# Altium PCB CoreV1.1_test.PcbDoc (part 9 of 14)
Units mil, origin at the board's own origin, x right, y up, seen from the top; angles counter-clockwise.
Board outline 2860 x 2420 mil, 6 copper layers (Top Layer, GND, SIGNAL_1, SIGNAL_2, POWER, Bottom Layer); 110 components, 241 nets, 882 pads, 697 vias.
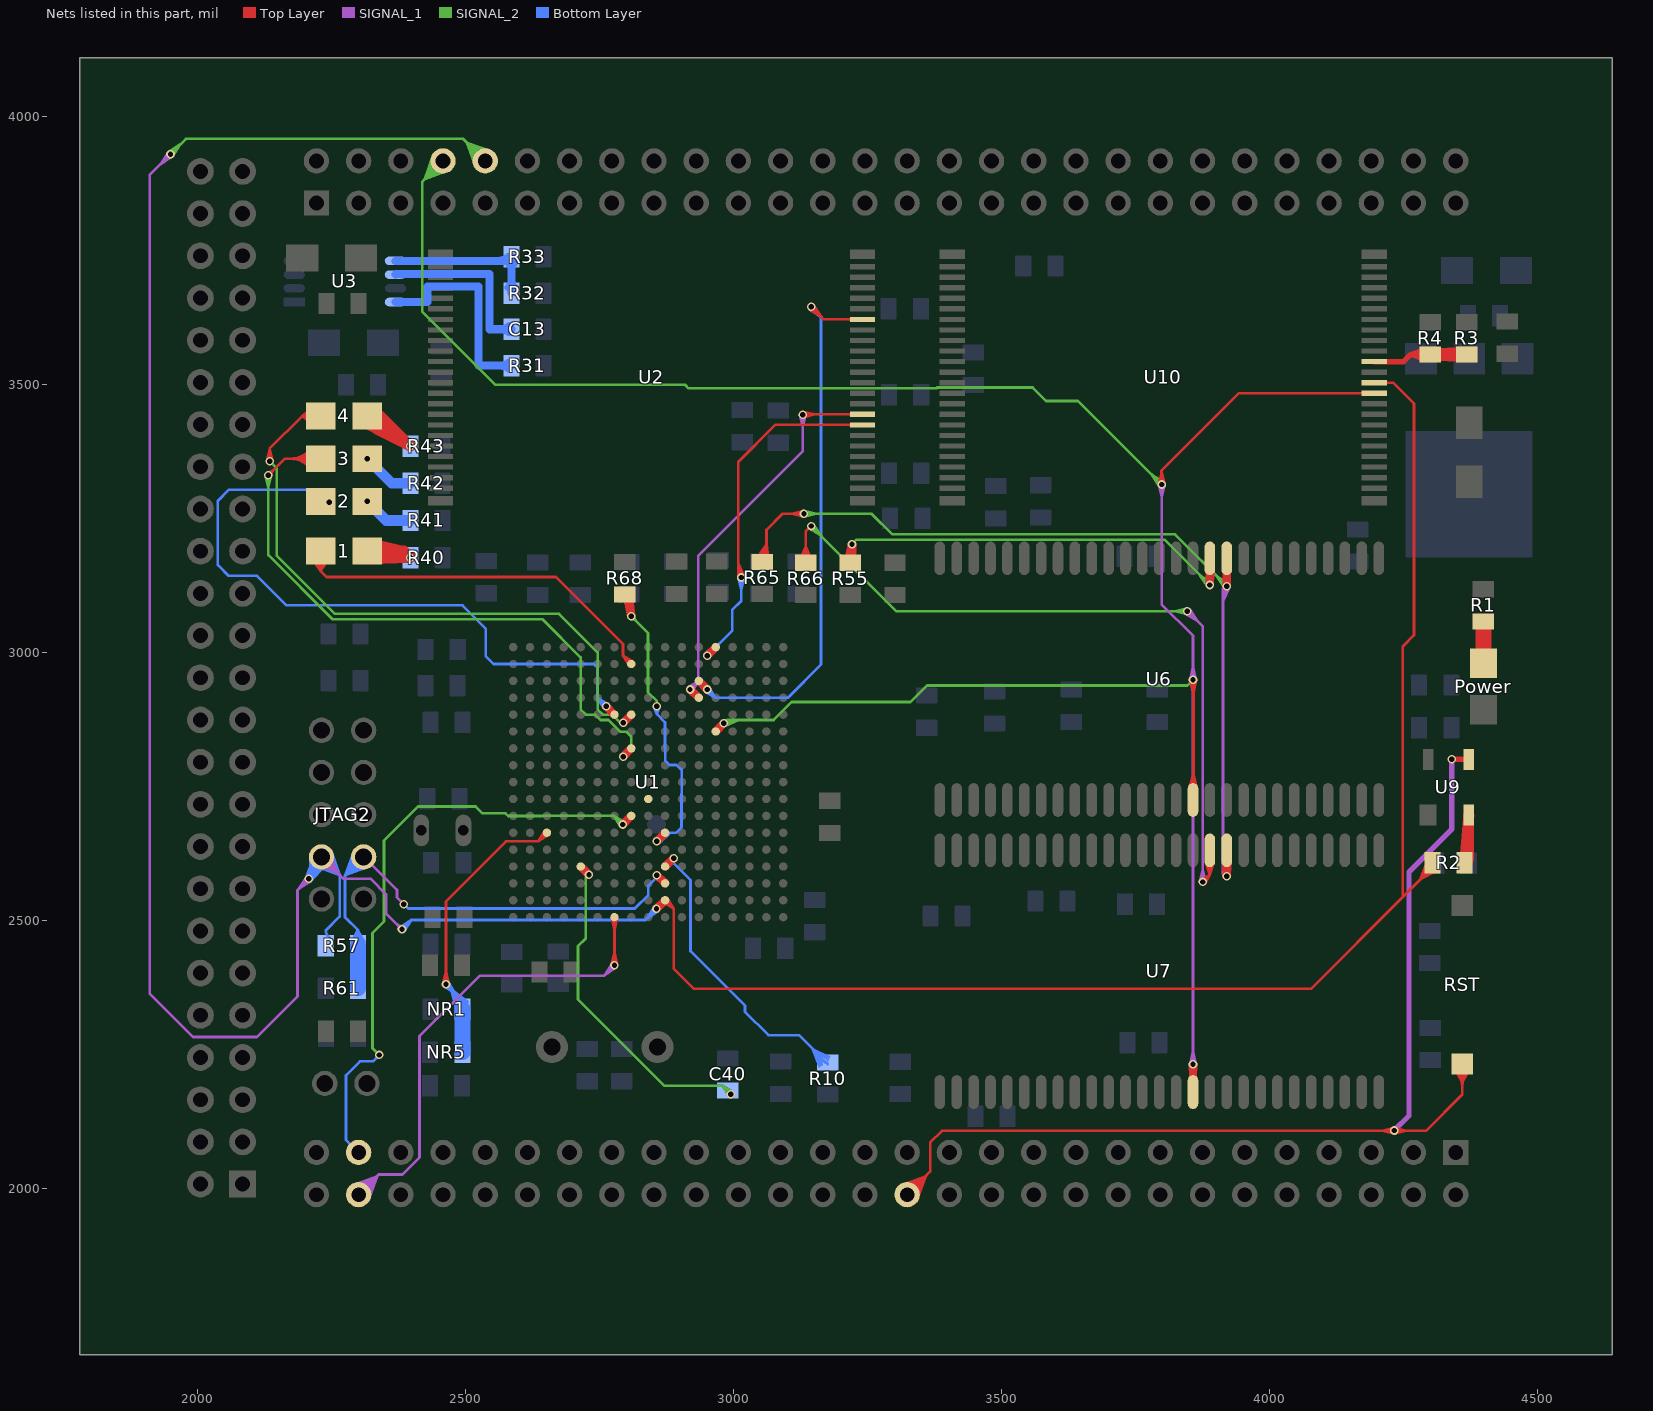
[diagram p13: the nets of this part, all layers, seen from the top]

## Via types
v1: diameter 16, hole 10, Top Layer to Bottom Layer, tented both sides, 637 vias
v2: diameter 30, hole 18, Top Layer to Bottom Layer, tented both sides, 56 vias
v3: diameter 16, hole 10, Top Layer to Bottom Layer, 2 vias
v4: diameter 30, hole 16, Top Layer to Bottom Layer, tented both sides, 1 vias
v5: diameter 16/16/16/16 (per signal layer), hole 10, Top Layer to Bottom Layer, tented both sides, 1 vias

## Nets (pads, with @x,y where several pads share a name; then routed paths per layer and width w, separated by ;. In a path a pad name is that pad's centre, name@x,y a point inside that pad or via, vN(x,y) a via of type N, cw(c..) or ccw(c..) an arc to the next point about the centre after c; other vN are vias at no path point) (continued)
LNWE: pad.PC8 U1.E6 U6.16 U7.16 U10.11 | length 6656.2
  Top Layer w5: U1.E6@2966.87,2858 ccw(c2966.87,2870.97) 2976.04,2861.8 ccw(c2985.22,2852.62) U1.E6@2972.24,2852.62 ; v1@2976.5,2867.75 cw(c2963.22,2867.75) 2972.61,2858.36 cw(c2982,2848.97) v1@2982,2862.25 ; v1@2976.94,2869.92 U1.E6@2971.12,2849.33 ; v1@2977.64,2871.11 U1.E6@2966.87,2852.62 ; v1@2978.62,2872.09 U1.E6@2963.58,2856.87 ; v1@2984.17,2862.7 U1.E6@2963.58,2856.87 ; v1@2985.36,2863.4 U1.E6@2966.87,2852.62 ; v1@2986.34,2864.37 U1.E6@2971.12,2849.33 ; v1@3793.46,3314.16 3798.92,3336.5 v1@3804.38,3314.16 ; v1@3795.03,3317.39 ccw(c3785.64,3326.78) 3798.92,3326.78 ccw(c3812.2,3326.78) v1@3802.81,3317.39 ; v1(3798.92,3313.5) 3798.92,3339.42 3943.5,3484 4195.66,3484 U10.11@4195.83,3483.84 ; U7.16@3850.31,2202.47 v1@3857.57,2226.23 ; U6.16@3850.35,2747.71 3858.39,2771.24 ; v1@3852.1,2232.06 U7.16@3852.18,2208.59 ; v1@3852.13,2948.15 3858.39,2925.96 ; U7.16@3852.38,2206.58 ccw(c3839.84,2219.11) 3857.57,2219.11 ccw(c3875.29,2219.11) U7.16@3862.76,2206.58 ; v1@3852.4,2229.55 U7.16@3862.96,2208.59 ; U6.16@3852.38,2751.58 ccw(c3837.85,2766.1) 3858.39,2766.1 ; v1@3853.68,2227.54 cw(c3844.29,2218.15) 3857.57,2218.15 cw(c3870.85,2218.15) v1@3861.46,2227.54 ; v1@3853.68,2945.11 cw(c3842.3,2933.73) 3858.39,2933.73 ; U7.16@3857.57,2179.73 v1(3857.57,2231.43) ; U7.16@3857.57,2201.39 v1@3857.57,2226.23 ; U6.16@3857.57,2724.73 3858.39,2725.56 3858.39,2948.17 v1(3857.57,2949) 3858.39,2925.96 ; U6.16@3857.57,2746.39 3858.39,2771.24 ; 3858.39,2762.12 ccw(c3873.3,2762.12) U6.16@3862.76,2751.58 ; 3858.39,2937.71 cw(c3868.85,2937.71) v1@3861.46,2945.11 ; v1@3862.74,2229.55 U7.16@3852.18,2208.59 ; v1@3863.03,2232.06 U7.16@3862.96,2208.59 ; v1@3863.05,2948.54 3858.39,2925.96 ; U7.16@3864.83,2202.47 v1@3857.57,2226.23 ; U6.16@3864.86,2747.23 3858.39,2771.24 ; 4157.2,3484 U10.11@4177.13,3483.84 ; 4170.89,3484 cw(c4170.89,3477.6) U10.11@4175.41,3482.13 ; 4171.67,3484 ccw(c4171.67,3489.29) U10.11@4175.41,3485.55 ; U1.E6@2963.58,2856.87 v1(2982,2867.75) ; U1.E6@2963.58,2856.87 v1(2982,2867.75) ; U1.E6@2966.87,2852.62 v1(2982,2867.75) ; U1.E6@2966.87,2852.62 v1(2982,2867.75) ; U1.E6@2971.12,2849.33 v1(2982,2867.75) ; U1.E6@2971.12,2849.33 v1(2982,2867.75) ; U7.16@3852.18,2208.59 v1(3857.57,2231.43) ; U7.16@3857.57,2208.43 3863.03,2230.77 U7.16@3857.57,2208.43 ; U7.16@3857.57,2208.43 3852.11,2230.77 U7.16@3857.57,2208.43 ; U7.16@3857.57,2208.43 v1(3857.57,2231.43) ; v1(3857.57,2231.43) U7.16@3862.96,2208.59
  SIGNAL_1 w5: v1@3793.46,3312.82 3799,3290.5 ; v1@3795.03,3309.61 cw(c3785.45,3300.03) 3799,3300.03 ; v1(3798.92,3313.5) 3799,3290.5 ; 3799,3300.41 cw(c3812.01,3300.41) v1@3802.81,3309.61 ; v1@3799,3313.5 3799,3090 3857.57,3031.43 v1(3857.57,2949) ; v1@3804.38,3312.86 3799,3290.5 ; v1@3852.11,2232.09 3857.57,2254.43 v1@3863.03,2232.09 ; v1@3852.11,2948.34 3857.57,2926 ; v1@3852.11,2949.66 3857.57,2972 v1@3863.03,2949.66 ; v1@3853.68,2235.32 ccw(c3844.29,2244.71) 3857.57,2244.71 ccw(c3870.85,2244.71) v1@3861.46,2235.32 ; v1@3853.68,2945.11 cw(c3844.29,2935.72) 3857.57,2935.72 cw(c3870.85,2935.72) v1@3861.46,2945.11 ; v1@3853.68,2952.89 ccw(c3844.29,2962.28) 3857.57,2962.28 ccw(c3870.85,2962.28) v1@3861.46,2952.89 ; v1(3857.57,2231.43) v1(3857.57,2949) ; v1@3863.03,2948.34 3857.57,2926 ; 3857.57,2926 v1(3857.57,2949)
  SIGNAL_2 w5: pad.PC8@2436.89,3917.45 cw(c2385.9,3917.45) 2421.96,3881.39 cw(c2458.02,3845.33) pad.PC8@2458.02,3896.33 ; pad.PC8@2440.18,3928.77 2423.79,3883.22 ; pad.PC8@2441.89,3917.45 cw(c2402.97,3917.45) 2430.49,3889.93 cw(c2458.02,3862.4) pad.PC8@2458.02,3901.33 ; pad.PC8@2444.88,3926.79 2423.79,3883.22 ; pad.PC8@2446.89,3917.45 cw(c2420.04,3917.45) 2439.03,3898.46 cw(c2458.02,3879.48) pad.PC8@2458.02,3906.33 ; pad.PC8@2449.3,3924.36 2423.79,3883.22 ; pad.PC8@2453.42,3921.49 2423.79,3883.22 ; pad.PC8@2458.02,3917.45 2419,3878.43 2419,3636.5 2556,3499.5 2910,3499.5 2916.5,3493 3379,3493 3380.5,3494.5 3558.42,3494.5 3583.42,3469.5 3642.92,3469.5 v1(3798.92,3313.5) 3780.31,3332.11 ; pad.PC8@2462.06,3912.85 2423.79,3883.22 ; pad.PC8@2464.93,3908.73 2423.79,3883.22 ; pad.PC8@2467.36,3904.31 2423.79,3883.22 ; pad.PC8@2469.33,3899.61 2423.79,3883.22 ; v1@2981.3,2873.21 3009.21,2873.99 ; v1(2982,2867.75) 3009.21,2873.99 ; v1@2982.35,2867.4 cw(c2998.27,2851.48) 2998.27,2873.99 ; v1@2983.75,2862.54 3009.21,2873.99 ; v1@2985.89,2863.86 cw(c3010.34,2839.41) 3010.34,2873.99 ; 2988.24,2873.99 3075.13,2873.99 3108.64,2907.5 3330.22,2907.5 3361.22,2938.5 3847.07,2938.5 v1(3857.57,2949) ; v1@3793.42,3313.5 ccw(c3780.14,3313.5) 3789.53,3322.89 ccw(c3798.92,3332.28) v1@3798.92,3319 ; v1@3794.65,3310.04 3780.31,3332.11 ; v1@3802.38,3317.77 3780.31,3332.11
LSCKE: R65.1 U6.37 U7.37 | length 3189.9
  Top Layer w5: R65.1@3042.07,3174.38 3061.5,3201.4 ; R65.1@3046.39,3171.75 3061.5,3201.4 ; R65.1@3049.57,3177.95 ccw(c3020.77,3206.76) 3061.5,3206.76 ; R65.1@3053.11,3174.42 ccw(c3032.84,3194.68) 3061.5,3194.68 ; R65.1@3060.84,3168.12 3061.5,3201.4 ; 3061.5,3191.83 ccw(c3081.13,3191.83) R65.1@3067.25,3177.95 ; R65.1@3065.89,3168.41 3061.5,3201.4 ; v1@3127.61,3255.11 ccw(c3118.22,3245.72) 3118.22,3259 ccw(c3118.22,3272.28) v1@3127.61,3262.89 ; v1@3130.84,3253.54 3108.5,3259 ; v1@3130.84,3264.46 3108.5,3259 ; U7.37@3913.3,2608.18 v1@3920.56,2584.42 ; U6.37@3913.3,3153.18 v1@3920.56,3129.42 ; v1@3915.12,2581.6 U7.37@3914.3,2604.91 ; v1@3915.09,3123.39 U6.37@3915.22,3146.88 ; U7.37@3915.37,2604.07 cw(c3902.83,2591.53) 3920.56,2591.53 cw(c3938.29,2591.53) U7.37@3925.75,2604.07 ; U6.37@3915.37,3149.07 cw(c3902.83,3136.53) 3920.56,3136.53 cw(c3938.29,3136.53) U6.37@3925.75,3149.07 ; v1@3915.39,3125.87 U6.37@3925.9,3146.88 ; v1@3915.47,2584.53 U7.37@3926.82,2604.91 ; v1@3916.67,2586.33 ccw(c3907.28,2595.72) 3920.56,2595.72 ccw(c3933.84,2595.72) v1@3924.45,2586.33 ; v1@3916.67,3127.89 ccw(c3907.28,3137.28) 3920.56,3137.28 ccw(c3933.84,3137.28) v1@3924.45,3127.89 ; U7.37@3920.56,2609.26 v1@3920.56,2584.42 ; U7.37@3920.56,2630.91 v1(3920.56,2582.44) ; U6.37@3920.56,3154.26 v1@3920.56,3129.42 ; U6.37@3920.56,3175.91 v1(3920.56,3124) ; v1@3925.65,2584.53 U7.37@3914.3,2604.91 ; v1@3925.73,3125.87 U6.37@3915.22,3146.88 ; v1@3926,2581.6 U7.37@3926.82,2604.91 ; v1@3926.03,3123.39 U6.37@3925.9,3146.88 ; U7.37@3927.82,2608.18 v1@3920.56,2584.42 ; U6.37@3927.82,3153.18 v1@3920.56,3129.42 ; 3061.5,3201.4 R65.1@3053.41,3169.12 3061.5,3177.21 3061.5,3229 3091.5,3259 v1(3131.5,3259) 3108.5,3259 ; U7.37@3914.3,2604.91 v1(3920.56,2582.44) ; U6.37@3915.22,3146.88 v1(3920.56,3124) ; v1(3920.56,2582.44) U7.37@3926.82,2604.91 ; v1(3920.56,2582.44) U7.37@3920.56,2605.44 ; U7.37@3920.56,2605.44 3915.1,2583.1 U7.37@3920.56,2605.44 ; U7.37@3920.56,2605.44 3926.02,2583.1 U7.37@3920.56,2605.44 ; v1(3920.56,3124) U6.37@3925.9,3146.88 ; v1(3920.56,3124) U6.37@3920.56,3147 ; U6.37@3920.56,3147 3915.1,3124.66 U6.37@3920.56,3147 ; U6.37@3920.56,3147 3926.02,3124.66 U6.37@3920.56,3147
  SIGNAL_1 w5: 3913.5,2588.62 ccw(c3926.74,2588.62) v1@3917.38,2579.26 ; 3913.5,2600.69 ccw(c3938.81,2600.69) v1@3920.91,2582.79 ; 3913.5,2612.76 ccw(c3950.88,2612.76) v1@3924.45,2586.33 ; 3913.5,3093.68 cw(c3950.88,3093.68) v1@3924.45,3120.11 ; 3913.5,3105.75 cw(c3938.81,3105.75) v1@3920.91,3123.65 ; 3913.5,3117.82 cw(c3926.74,3117.82) v1@3917.38,3127.18 ; v1@3915.12,2581.64 3913.5,2611.52 ; v1@3915.12,3124.8 3913.5,3094.92 ; v1@3925.76,2584.22 3913.5,2611.52 ; v1@3925.76,3122.22 3913.5,3094.92 ; 3913.5,2611.52 v1(3920.56,2582.44) 3913.5,2589.5 3913.5,3116.94 v1(3920.56,3124) 3913.5,3094.92
  SIGNAL_2 w5: v1(3131.5,3259) 3258,3259 3296.5,3220.5 3824.06,3220.5 v1(3920.56,3124) ; v1@3132.16,3253.54 3154.5,3259 v1@3132.16,3264.46 ; v1@3135.39,3255.11 cw(c3144.78,3245.72) 3144.78,3259 cw(c3144.78,3272.28) v1@3135.39,3262.89 ; v1@3915.06,3124 ccw(c3901.78,3124) 3911.17,3133.39 ccw(c3920.56,3142.78) v1@3920.56,3129.5 ; v1@3916.29,3120.54 3901.95,3142.61 ; v1@3920.56,3121.64 v1(3920.56,3124) ; v1@3924.02,3128.27 3901.95,3142.61 ; 3901.95,3142.61 v1(3920.56,3124)
LSCLK0: R55.1 U6.38 | length 1855.7
  Top Layer w5: R55.1@3205.85,3170.11 v1@3218.08,3197.5 ; R55.1@3209.24,3176.34 ccw(c3187.9,3197.68) 3218.08,3197.68 ccw(c3248.25,3197.68) R55.1@3226.92,3176.34 ; R55.1@3210.64,3168.44 v1@3218.08,3197.5 ; R55.1@3212.77,3172.81 ccw(c3199.97,3185.61) 3218.08,3185.61 ccw(c3236.18,3185.61) R55.1@3223.38,3172.81 ; v1@3215.73,3201.87 R55.1@3218.08,3178.21 ; v1@3215.83,3200.71 R55.1@3223.19,3177.55 ; v1@3215.86,3202.97 R55.1@3213.42,3179.31 ; v1@3216.05,3199.92 R55.1@3226.88,3177.78 ; v1@3216.06,3203.67 R55.1@3210.41,3180.34 ; R55.1@3218.08,3167.5 3218.08,3198.63 v1(3221.22,3201.78) ; R55.1@3218.08,3180.9 cw(c3242.1,3180.9) v1@3225.11,3197.89 ; 3218.08,3192.97 cw(c3230.03,3192.97) v1@3221.58,3201.42 ; R55.1@3225.52,3168.44 v1@3218.08,3197.5 ; v1@3225.82,3198.75 R55.1@3210.41,3180.34 ; v1@3226.18,3199.38 R55.1@3213.42,3179.31 ; v1@3226.56,3200.42 R55.1@3218.08,3178.21 ; v1@3226.72,3201.6 R55.1@3223.19,3177.55 ; v1@3226.69,3202.43 R55.1@3226.88,3177.78 ; R55.1@3230.3,3170.11 v1@3218.08,3197.5 ; U6.38@3881.8,3153.18 v1@3889.06,3129.42 ; v1@3883.61,3125.26 U6.38@3883.2,3148.6 ; U6.38@3883.87,3149.07 cw(c3871.34,3136.53) 3889.06,3136.53 cw(c3906.79,3136.53) U6.38@3894.26,3149.07 ; v1@3883.94,3128 U6.38@3894.93,3148.6 ; v1@3885.17,3129.89 ccw(c3875.79,3139.28) 3889.06,3139.28 ccw(c3902.34,3139.28) v1@3892.95,3129.89 ; U6.38@3889.06,3154.26 v1@3889.06,3129.42 ; U6.38@3889.06,3175.91 v1(3889.06,3126) ; v1@3894.19,3128 U6.38@3883.2,3148.6 ; v1@3894.51,3125.26 U6.38@3894.93,3148.6 ; U6.38@3896.33,3153.18 v1@3889.06,3129.42 ; R55.1@3210.41,3180.34 v1(3221.22,3201.78) ; R55.1@3213.42,3179.31 v1(3221.22,3201.78) ; R55.1@3218.08,3178.21 v1(3221.22,3201.78) ; v1(3221.22,3201.78) R55.1@3226.88,3177.78 ; v1(3221.22,3201.78) R55.1@3223.19,3177.55 ; U6.38@3883.2,3148.6 v1(3889.06,3126) ; v1(3889.06,3126) U6.38@3894.93,3148.6 ; v1(3889.06,3126) U6.38@3889.06,3149 ; U6.38@3889.06,3149 3883.6,3126.66 U6.38@3889.06,3149 ; U6.38@3889.06,3149 3894.52,3126.66 U6.38@3889.06,3149
  SIGNAL_2 w5: v1(3221.22,3201.78) 3229.95,3210.5 3804.5,3210.5 3889,3126 v1(3889.06,3126) 3870.43,3144.57 ; 3879.57,3135.43 ccw(c3889.06,3144.93) v1@3889.06,3131.5 ; 3879.72,3135.28 cw(c3870.44,3126) v1@3883.56,3126 ; v1@3884.8,3122.53 3870.43,3144.57 ; v1@3892.52,3130.28 3870.43,3144.57
LSCLK1: R66.1 U7.38 | length 2106.7
  Top Layer w5: R66.1@3122.52,3170.11 3134.74,3197.5 ; R66.1@3125.9,3176.34 ccw(c3104.57,3197.68) 3134.74,3197.68 ccw(c3164.92,3197.68) R66.1@3143.58,3176.34 ; R66.1@3127.3,3168.44 3134.74,3197.5 ; R66.1@3129.44,3172.81 ccw(c3116.64,3185.61) 3134.74,3185.61 ccw(c3152.85,3185.61) R66.1@3140.05,3172.81 ; R66.1@3134.74,3167.5 3134.74,3225.74 v1(3145,3236) ; R66.1@3142.18,3168.44 3134.74,3197.5 ; R66.1@3146.97,3170.11 3134.74,3197.5 ; v1@3872.73,2576.28 3889.06,2584.92 ; v1(3876,2571.86) 3889.06,2584.92 ; v1@3876,2577.36 ccw(c3876,2590.64) 3885.39,2581.25 ccw(c3894.78,2571.86) v1@3881.5,2571.86 ; v1@3880.42,2568.59 3889.06,2584.92 ; U7.38@3881.81,2608.15 3889.06,2584.92 ; U7.38@3883.87,2604.07 cw(c3871.34,2591.53) 3889.06,2591.53 cw(c3906.79,2591.53) U7.38@3894.26,2604.07 ; U7.38@3889.06,2609.26 3889.06,2584.92 ; U7.38@3889.06,2630.91 3889.06,2584.92 ; U7.38@3896.32,2608.15 3889.06,2584.92
  SIGNAL_1 w5: v1@3843.59,3072.61 3865.8,3058.7 ; v1@3846.98,3071.44 cw(c3846.98,3056.76) 3857.36,3067.14 ; v1@3851.2,3080.46 3865.8,3058.7 ; v1@3852.48,3076.94 ccw(c3864.36,3076.94) 3855.96,3068.54 ; v1@3870.54,2572.52 3876,2594.86 v1@3881.46,2572.52 ; v1@3872.11,2575.75 ccw(c3862.72,2585.14) 3876,2585.14 ccw(c3889.28,2585.14) v1@3879.89,2575.75 ; v1(3876,2571.86) 3876,3048.5 3847.56,3076.94 v1(3846.98,3076.94) 3865.8,3058.7
  SIGNAL_2 w5: v1@3141.54,3231.73 3163.61,3217.39 v1@3149.27,3239.46 ; v1@3145,3230.5 cw(c3145,3217.22) 3154.39,3226.61 cw(c3163.78,3236) v1@3150.5,3236 ; v1(3145,3236) 3217.79,3163.21 3304.06,3076.94 v1(3846.98,3076.94) 3823.98,3076.94 ; v1@3843.09,3073.05 ccw(c3833.71,3063.66) 3833.71,3076.94 ccw(c3833.71,3090.21) v1@3843.09,3080.83 ; v1@3846.33,3071.48 3823.98,3076.94 ; v1@3846.33,3082.4 3823.98,3076.94
M_NRESET: pad.PA28 RST.1 U9.3 | length 3059.8
  Top Layer w5: pad.PA28@3312.84,2006.15 3358.39,2022.54 ; pad.PA28@3314.82,2001.46 3358.39,2022.54 ; pad.PA28@3317.25,1997.03 3358.39,2022.54 ; pad.PA28@3320.11,1992.91 3358.39,2022.54 ; pad.PA28@3324.16,1988.32 3367,2031.16 3367,2085.5 3389,2107.5 v1@4232.5,2107.5 ; pad.PA28@3324.16,1999.44 ccw(c3324.16,2026.29) 3343.14,2007.3 ccw(c3362.13,1988.32) pad.PA28@3335.28,1988.32 ; pad.PA28@3324.16,2004.44 ccw(c3324.16,2043.36) 3351.68,2015.84 ccw(c3379.2,1988.32) pad.PA28@3340.28,1988.32 ; pad.PA28@3324.16,2009.44 ccw(c3324.16,2060.43) 3360.22,2024.37 ccw(c3396.27,1988.32) pad.PA28@3345.28,1988.32 ; pad.PA28@3328.75,1984.27 3358.39,2022.54 ; pad.PA28@3332.87,1981.41 3358.39,2022.54 ; pad.PA28@3337.3,1978.97 3358.39,2022.54 ; pad.PA28@3341.99,1977 3358.39,2022.54 ; 4218.51,2107.5 ccw(c4218.51,2122.49) v1@4229.11,2111.89 ; 4220.93,2107.5 cw(c4220.93,2095.93) v1@4229.11,2104.11 ; v1@4232.22,2113.45 4209.98,2107.5 ; v1@4232.46,2102.53 4209.98,2107.5 ; v1@4233.54,2102.53 4256.01,2107.5 ; v1@4233.78,2113.45 4256.01,2107.5 ; v1@4236.89,2104.11 cw(c4245.07,2095.93) 4245.07,2107.5 ; v1@4236.89,2111.89 ccw(c4247.49,2122.49) 4247.49,2107.5 ; RST.1@4343.35,2228.1 4360,2197.68 ; RST.1@4347.85,2220.21 cw(c4318.51,2190.87) 4360,2190.87 cw(c4401.49,2190.87) RST.1@4372.15,2220.21 ; RST.1@4348,2230.22 4360,2197.68 ; RST.1@4351.38,2223.75 cw(c4330.58,2202.94) 4360,2202.94 cw(c4389.42,2202.94) RST.1@4368.62,2223.75 ; RST.1@4352.85,2231.62 4360,2197.68 ; RST.1@4360,2232.36 4360,2175 4292.5,2107.5 4233,2107.5 v1@4232.5,2107.5 ; RST.1@4367.15,2231.62 4360,2197.68 ; RST.1@4372,2230.22 4360,2197.68 ; RST.1@4376.65,2228.1 4360,2197.68 ; 4209.98,2107.5 v1(4233,2108) ; v1@4232.5,2107.5 v1(4233,2108) ; v1(4233,2108) 4256.01,2107.5
  Top Layer w10: v1(4340.71,2800.71) U9.3@4371.76,2800.71 ; U9.3@4368.34,2797.28 ccw(c4360.07,2789.02) 4360.07,2800.71 ccw(c4360.07,2812.4) U9.3@4368.34,2804.13
  SIGNAL_1 w10: v1(4233,2108) 4260.52,2135.52 4260.52,2590.52 4340.71,2670.71 v1(4340.71,2800.71)
MPLLCAP: C40.1 U1.N14 | length 947.9
  Top Layer w5: v1@2725.23,2583.08 U1.N14@2719.14,2603.96 ; v1@2725.93,2581.91 U1.N14@2714.9,2600.65 ; v1@2726.88,2580.95 U1.N14@2711.6,2596.41 ; v1@2732.47,2590.32 U1.N14@2711.6,2596.41 ; v1@2733.64,2589.63 U1.N14@2714.9,2600.65 ; v1@2734.61,2588.67 U1.N14@2719.14,2603.96 ; U1.N14@2711.6,2596.41 v1(2730.28,2585.28) ; U1.N14@2711.6,2596.41 v1(2730.28,2585.28) ; U1.N14@2714.9,2600.65 v1(2730.28,2585.28) ; U1.N14@2714.9,2600.65 v1(2730.28,2585.28) ; U1.N14@2719.14,2603.96 v1(2730.28,2585.28) ; U1.N14@2719.14,2603.96 v1(2730.28,2585.28)
  SIGNAL_2 w5: v1(2730.28,2585.28) 2724.56,2579.56 2724.56,2466.76 2710.02,2452.22 2710.02,2352.69 2871.21,2191.5 2979.5,2191.5 ; v1@2989.5,2176 ccw(c2976.22,2176) 2985.61,2185.39 ccw(c2995,2194.78) v1@2995,2181.5 ; v1@2990.65,2172.63 2979.5,2191.5 ; v1@2995,2177.27 v1(2995,2176) ; v1@2998.37,2180.35 2979.5,2191.5 ; 2979.5,2191.5 v1(2995,2176) ; 2979.5,2191.5 v1(2995,2176)
NCON: NR1.2 NR5.1 U1.R12 | length 1273.2
  Top Layer w5: v1@2458.04,2381.66 2463.5,2404 v1@2468.96,2381.66 ; v1@2459.61,2384.89 ccw(c2450.22,2394.28) 2463.5,2394.28 ccw(c2476.78,2394.28) v1@2467.39,2384.89 ; v1(2463.5,2381) 2463.5,2535.5 2575.52,2647.52 2635.79,2647.52 ; U1.R12@2646.54,2663.65 cw(c2633.56,2663.65) 2642.74,2654.47 cw(c2651.91,2645.3) U1.R12@2651.91,2658.27 ; U1.R12@2647.69,2666.97 2635.79,2647.52 ; U1.R12@2655.24,2659.42 2635.79,2647.52 ; 2635.79,2647.52 U1.R12@2651.91,2663.65 2635.79,2647.52
  Bottom Layer w5: v1@2460.04,2376.73 2482.11,2362.39 v1@2467.77,2384.46 ; v1@2463.5,2375.5 cw(c2463.5,2362.22) 2472.89,2371.61 cw(c2482.28,2381) v1@2469,2381 ; v1(2463.5,2381) 2494.5,2350 NR1.2@2494.5,2334.59 ; v1@2465.79,2378.71 cw(c2426.68,2339.59) NR1.2@2482,2339.59 ; 2474.33,2370.17 cw(c2443.75,2339.59) NR1.2@2487,2339.59 ; 2482.86,2361.64 cw(c2460.82,2339.59) NR1.2@2492,2339.59 ; NR1.2@2483.07,2334.52 2473.9,2370.6 ; NR1.2@2487.86,2336.09 2473.9,2370.6 ; NR1.2@2494.5,2339.59 2473.9,2370.6 ; NR1.2@2500.29,2344.35 2473.9,2370.6 ; NR1.2@2503.6,2348.16 2473.9,2370.6
  Bottom Layer w30: NR5.1@2494,2254.32 NR5.1@2494.5,2254.81 ; NR5.1@2494.5,2254.81 NR1.2@2494.5,2334.59 2494,2259.32 2494.5,2329.59 NR5.1@2494.5,2254.81
NCTS0: pad.PA53 U1.K11 | length 1537.3
  Top Layer w5: v1@2788.96,2682.44 U1.K11@2805.17,2698.47 ; v1@2790.98,2684.02 U1.K11@2812.72,2690.92 ; v1@2793.27,2684.52 ccw(c2793.27,2697.8) 2802.66,2688.41 ccw(c2812.05,2679.02) v1@2798.77,2679.02 ; v1@2796.68,2674.71 U1.K11@2812.72,2690.92 ; v1@2798.27,2676.74 U1.K11@2805.17,2698.47 ; U1.K11@2804.02,2695.14 cw(c2791.04,2695.14) 2800.22,2685.97 cw(c2809.39,2676.79) U1.K11@2809.39,2689.77 ; U1.K11@2809.39,2695.61 U1.K11@2809.39,2695.14 ; v1(2793.27,2679.02) U1.K11@2809.39,2695.14 ; v1(2793.27,2679.02) U1.K11@2812.72,2690.92 ; v1(2793.27,2679.02) U1.K11@2805.17,2698.47 ; v1(2793.27,2679.02) U1.K11@2809.39,2695.14 ; U1.K11@2809.39,2695.14 2789.88,2683.35 U1.K11@2809.39,2695.14 ; U1.K11@2809.39,2695.14 2797.6,2675.63 U1.K11@2809.39,2695.14
  SIGNAL_2 w5: v1(2339,2249) 2326.5,2261.5 2326.5,2476.58 2348,2498.08 2348,2649 2411.5,2712.5 2519,2712.5 2531.5,2700 2575,2700 2579.92,2695.08 2609.92,2695.08 2609.98,2695.02 2642.21,2695.02 2642.69,2695.5 2754.58,2695.5 2776.81,2695.48 ; v1@2787.77,2679.02 ccw(c2774.49,2679.02) 2783.88,2688.41 ccw(c2793.27,2697.8) v1@2793.27,2684.52 ; v1@2788.95,2675.62 2776.81,2695.48 ; v1@2796.67,2683.34 2776.81,2695.48 ; 2776.81,2695.48 v1(2793.27,2679.02) 2776.81,2695.48
  Bottom Layer w5: pad.PA53@2300.54,2067.06 2277,2090.59 2277,2211 2303,2237 2327,2237 v1(2339,2249)
NetC13_1: C13.1 U3.6 | length 400.8
  Bottom Layer w15: U3.6@2369.3,3705.25 2370.05,3706 2545,3706 2545,3603.27 C13.1@2585.49,3603.27 ; U3.6@2381.31,3705.25 2434.39,3706 ; C13.1@2580.19,3597.96 ccw(c2567.39,3585.16) 2567.39,3603.27 ccw(c2567.39,3621.37) C13.1@2580.19,3608.57
NetLED1_1: 1.1 R40.1 | length 686.7
  Top Layer w20: 1.1@2329.64,3178.8 cw(c2355.25,3153.2) 2355.25,3189.41 cw(c2355.25,3225.62) 1.1@2329.64,3200.02 ; 2372.13,3189.41 cw(c2372.13,3152.17) v1@2398.46,3178.5 ; 2384.73,3189.41 v1(2397.05,3177.09) ; 2384.73,3189.41 1.1@2316.47,3189.41 v1(2397.05,3177.09) ; 2384.73,3189.41 2320.75,3204.31 v1(2397.05,3177.09) ; 2384.73,3189.41 2320.75,3174.51 v1(2397.05,3177.09) ; 2384.73,3189.41 2319.03,3189.41 v1(2397.05,3177.09)
NetLED2_1: 2.1 R41.1 | length 95.3
  Bottom Layer w20: v1(2316.47,3282.08) 2352.13,3246.42 R41.1@2397.05,3246.42
NetLED3_1: 3.1 R42.1 | length 99.6
  Bottom Layer w20: v1(2316.47,3361.74) 2362.46,3315.76 R42.1@2397.05,3315.76
NetLED4_1: 4.1 R43.1 | length 774.9
  Top Layer w20: 4.1@2311.23,3428.6 v1@2396.98,3385.16 ; 4.1@2316.47,3441.41 2340.73,3441.41 v1(2397.05,3385.09) ; 4.1@2319.03,3426.41 cw(c2319.03,3337.82) 2381.68,3400.46 ; 4.1@2319.03,3441.41 v1@2396.98,3385.16 ; 4.1@2319.03,3446.41 cw(c2319.03,3406.1) 2347.53,3434.6 ; 4.1@2328.73,3452.85 v1@2396.98,3385.16 ; 2335.54,3416.29 v1(2397.05,3385.09) ; 4.1@2340.4,3425.99 v1(2397.05,3385.09) ; 2346.45,3435.28 v1(2397.05,3385.09) ; 2346.62,3435.52 v1(2397.05,3385.09)
NetPower_1: Power.1 R1.2 | length 153.6
  Top Layer w20: Power.1@4399.41,2980.15 Power.1@4399.59,2979.97
  Top Layer w30: Power.1@4399.41,2980.15 R1.2@4399.41,3058 Power.1@4399.59,2982.53
NetR2_1: R2.1 U9.2 | length 343.3
  Top Layer w20: R2.1@4360.97,2616.13 ccw(c4334.91,2642.19) 4371.76,2642.19 ; R2.1@4364.5,2607.59 4371.76,2614.85 U9.2@4371.76,2696.77 U9.2@4372.5,2696.03 ; R2.1@4371.76,2617.09 4371.76,2686.93 4364.5,2612.59 U9.2@4371.76,2688.78
NetR3_2: R3.2 R4.1 U10.14 | length 1105.4
  Top Layer w10: U10.14@4195.83,3542.89 4250.39,3542.89 4263.77,3556.27 ; U10.14@4214.53,3542.89 4249.45,3542.89 ; R4.1@4288.02,3549.2 ccw(c4270.95,3532.13) 4270.95,3556.27 ccw(c4270.95,3580.41) R4.1@4288.02,3563.34 ; R4.1@4293.49,3546.4 4263.77,3556.27 ; R4.1@4293.49,3566.14 4263.77,3556.27 ; R4.1@4295.09,3556.27 4263.77,3556.27 ; R4.1@4305.09,3556.27 R3.2@4350.09,3556.27 ; R4.1@4306.2,3546.33 R3.2@4350.09,3556.27 ; R4.1@4306.2,3566.21 R3.2@4350.09,3556.27 ; R4.1@4312.16,3549.2 cw(c4329.23,3532.13) 4329.23,3556.27 cw(c4329.23,3580.41) R4.1@4312.16,3563.34 ; R3.2@4356.2,3549.2 ccw(c4339.13,3532.13) 4339.13,3556.27 ccw(c4339.13,3580.41) R3.2@4356.2,3563.34 ; R3.2@4360.63,3546.63 R4.1@4317.24,3563.71 ; R3.2@4360.63,3565.91 R4.1@4317.24,3548.83 ; R3.2@4363.8,3546.28 R4.1@4317.24,3548.83 ; R3.2@4363.8,3566.26 R4.1@4317.24,3563.71 ; R3.2@4368.27,3556.27 R4.1@4300.09,3556.27 4263.77,3556.27 ; R4.1@4317.24,3548.83 R3.2@4363.27,3556.27 ; R4.1@4317.24,3563.71 R3.2@4363.27,3556.27 ; R4.1@4318.27,3556.27 4362.16,3546.33 R4.1@4318.27,3556.27 ; R4.1@4318.27,3556.27 4362.16,3566.21 R4.1@4318.27,3556.27 ; R4.1@4318.27,3556.27 R3.2@4363.27,3556.27 ; R4.1@4318.27,3556.27 R3.2@4363.27,3556.27
NetR10_2: R10.2 U1.H14 | length 1166.4
  Top Layer w5: U1.H14@2872.38,2606.03 ccw(c2872.38,2620.87) v1@2882.87,2610.37 ; U1.H14@2877.76,2600.65 cw(c2888.87,2600.65) 2881.01,2608.51 ; v1@2883,2616 cw(c2869.72,2616) 2879.11,2606.61 cw(c2888.5,2597.22) v1@2888.5,2610.5 ; v1@2883.53,2618.36 U1.H14@2876.53,2597.24 ; v1@2884.15,2619.36 U1.H14@2873.15,2600.65 ; v1@2884.24,2619.48 U1.H14@2872.38,2600.65 ; v1@2885.2,2620.4 U1.H14@2869.17,2604.97 ; v1@2889,2616.5 v1(2888.5,2616) ; v1@2890.62,2610.92 U1.H14@2869.17,2604.97 ; v1@2891.77,2611.58 U1.H14@2872.38,2600.65 ; v1@2891.86,2611.65 U1.H14@2873.15,2600.65 ; v1@2892.74,2612.49 U1.H14@2876.53,2597.24 ; U1.H14@2869.17,2604.97 v1(2888.5,2616) ; U1.H14@2869.17,2604.97 v1(2888.5,2616) ; U1.H14@2872.38,2600.65 U1.H14@2873.15,2600.65 ; U1.H14@2872.38,2600.65 v1(2888.5,2616) ; U1.H14@2872.38,2600.65 v1(2888.5,2616) ; U1.H14@2873.15,2600.65 v1(2888.5,2616) ; U1.H14@2873.15,2600.65 v1(2888.5,2616) ; U1.H14@2876.53,2597.24 v1(2888.5,2616) ; U1.H14@2876.53,2597.24 v1(2888.5,2616)
  Bottom Layer w5: v1(2888.5,2616) 2888.5,2607 2919.87,2575.63 2919.87,2442.63 3021.5,2341 3021.5,2329.5 3065,2286 3121.91,2286 R10.2@3173.95,2233.95 ; 3148.16,2259.75 cw(c3123.4,2235) R10.2@3158.41,2235 ; 3152.99,2254.92 ccw(c3170.91,2272.85) R10.2@3170.91,2247.5 ; 3156.69,2251.21 cw(c3140.47,2235) R10.2@3163.41,2235 ; R10.2@3160.28,2228.41 3148.32,2259.58 ; R10.2@3164.85,2230.57 3148.32,2259.58 ; R10.2@3170.91,2235 3148.32,2259.58 ; R10.2@3173.95,2235 R10.2@3173.95,2233.95 ; R10.2@3175.83,2240.66 3148.32,2259.58 ; R10.2@3175.91,2232 3174.41,2233.5 R10.2@3173.95,2233.95 ; R10.2@3178.37,2245.03 3148.32,2259.58
NetR31_2: R31.2 U3.8 | length 529
  Bottom Layer w15: U3.8@2369.3,3654.5 2429,3654.5 ; U3.8@2381.31,3654.06 2429,3654.5 ; 2525.61,3535.41 R31.2@2585.61,3535.41 2524,3535.41 2524,3683.25 2429,3683.25 2429,3654.5 ; R31.2@2580.31,3530.11 ccw(c2567.51,3517.3) 2567.51,3535.41 ccw(c2567.51,3553.52) R31.2@2580.31,3540.71
NetR32_2: R32.2 R33.1 U3.5 | length 595
  Bottom Layer w15: U3.5@2369.3,3730.84 2578.24,3730.84 R33.1@2585.61,3738.21 R32.2@2585.61,3670.63 ; U3.5@2381.31,3730.84 2434.38,3730.84 ; 2561.78,3730.84 ccw(c2561.78,3757.04) R33.1@2580.31,3738.51 ; R32.2@2580.31,3680.94 ccw(c2567.51,3693.74) 2585.61,3693.74 ccw(c2603.72,3693.74) R32.2@2590.92,3680.94 ; R33.1@2580.31,3727.9 cw(c2567.51,3715.1) 2585.61,3715.1 cw(c2603.72,3715.1) R33.1@2590.92,3727.9 ; R32.2@2585.61,3673.21 2585.61,3733.21 2585.61,3675.63 R33.1@2585.61,3735.63
NetR68_2: R68.2 U1.H12 | length 1738.8
  Top Layer w5: R68.2@2790.84,3104.04 v1@2809,3075.03 ; R68.2@2794.38,3099.1 cw(c2767.51,3067.48) v1@2809,3067.48 ; R68.2@2795.31,3106.39 v1@2809,3075.03 ; R68.2@2797.62,3102.91 cw(c2776.7,3078.29) 2809,3078.29 ; R68.2@2799.06,3109.12 2809,3099.18 v1(2809,3068) ; R68.2@2800.85,3106.72 cw(c2785.89,3089.1) 2809,3089.1 ; R68.2@2802.47,3108.62 v1@2809,3075.03 ; v1@2803.5,3067.9 2805.83,3091.33 ; v1@2803.54,3068.66 2809,3091 v1@2814.46,3068.66 ; v1@2803.55,3068.76 2809.44,3091.01 ; v1@2803.59,3066.99 2801.79,3091.54 ; v1@2803.66,3069.31 2811.88,3091.3 ; v1@2803.75,3066.36 2798.84,3091.26 ; v1@2805.11,3071.89 ccw(c2795.72,3081.28) 2809,3081.28 ccw(c2822.28,3081.28) v1@2812.89,3071.89 ; R68.2@2809,3094.2 cw(c2816.9,3094.2) R68.2@2811.31,3099.78 ; R68.2@2809.95,3109.24 v1@2809,3075.03 ; v1@2813.77,3070.73 2798.84,3091.26 ; v1@2814.05,3070.19 2801.79,3091.54 ; v1@2814.33,3069.37 2805.83,3091.33 ; v1@2814.47,3068.55 2809.44,3091.01 ; v1@2814.5,3067.97 2811.88,3091.3 ; R68.2@2814.97,3108.72 v1@2809,3075.03 ; v1@2852.64,2651.36 U1.H12@2868.14,2666.95 ; v1@2854.75,2653.02 U1.H12@2875.68,2659.41 ; v1@2857,2653.5 ccw(c2857,2666.14) 2865.94,2657.2 ; v1@2860.43,2643.7 U1.H12@2875.68,2659.41 ; v1@2862.05,2645.83 U1.H12@2868.14,2666.95 ; v1@2862.5,2648 cw(c2876.42,2648) 2866.58,2657.84 ; U1.H12@2867.01,2663.65 cw(c2854.03,2663.65) 2863.21,2654.47 cw(c2872.38,2645.3) U1.H12@2872.38,2658.27 ; 2798.84,3091.26 v1(2809,3068) ; 2801.79,3091.54 v1(2809,3068) ; 2805.83,3091.33 v1(2809,3068) ; v1(2809,3068) 2811.88,3091.3 ; v1(2809,3068) 2809.44,3091.01 ; v1(2857,2648) U1.H12@2872.38,2663.65 ; v1(2857,2648) U1.H12@2875.68,2659.41 ; v1(2857,2648) U1.H12@2868.14,2666.95 ; v1(2857,2648) U1.H12@2872.38,2663.65 ; v1@2857,2648.26 U1.H12@2872.38,2663.65 ; v1@2857,2648.26 U1.H12@2875.68,2659.41 ; v1@2857,2648.26 U1.H12@2868.14,2666.95 ; v1@2857,2648.26 U1.H12@2872.38,2663.65 ; U1.H12@2872.38,2663.65 2853.59,2652.32 U1.H12@2872.38,2663.65 ; U1.H12@2872.38,2663.65 2861.37,2644.67 U1.H12@2872.38,2663.65
  SIGNAL_2 w5: v1@2809,3062.5 cw(c2809,3049.22) 2818.39,3058.61 cw(c2827.78,3068) v1@2814.5,3068 ; v1(2809,3068) 2840.5,3036.5 2840.5,2925.7 2857,2909.2 v1(2857,2900)
  Bottom Layer w5: v1@2851.59,2898.99 2857,2885.1 ; v1@2853.11,2896.11 cw(c2843.72,2886.72) 2857,2886.72 cw(c2870.28,2886.72) v1@2860.89,2896.11 ; v1(2857,2648) 2865.85,2648 2881.35,2663.5 ; v1@2857,2648.5 ccw(c2857.12,2670.78) 2872.87,2655.03 ; v1(2857,2900) 2857,2885.1 ; v1@2857.03,2653.5 ccw(c2857.21,2687.64) 2881.35,2663.5 ; v1@2862.41,2898.99 2857,2885.1 ; 2872.38,2821.13 2872.38,2869.72 2857,2885.1 ; 2872.51,2821 2872.51,2798.58 2880.82,2790.25 2893.66,2790.25 2903.5,2780.41 2903.5,2736.1 2903,2735.6 2903,2673.58 2892.92,2663.5 2881.35,2663.5
NFCE: U1.F4 U2.9 | length 1361.5
  Top Layer w5: v1@2914.79,2927.46 U1.F4@2931.13,2912.31 ; v1@2916.89,2925.92 U1.F4@2938.68,2919.85 ; v1@2919,2925.5 cw(c2919,2909.84) U1.F4@2930.08,2920.91 ; v1@2922.27,2935.42 U1.F4@2938.68,2919.85 ; v1@2923.95,2933.4 U1.F4@2931.13,2912.31 ; v1@2924.5,2931 ccw(c2935.39,2931) 2927.69,2923.3 ; U1.F4@2930,2915.61 ccw(c2917.03,2915.61) 2926.2,2924.79 ccw(c2935.37,2933.96) U1.F4@2935.37,2920.99 ; v1@3130.05,3449.47 3152.51,3444.47 ; v1@3130.27,3438.55 3152.51,3444.47 ; v1@3133.39,3440.11 cw(c3143.91,3429.59) 3143.91,3444.47 ; v1@3133.39,3447.89 ccw(c3141.65,3456.15) 3141.65,3444.47 ; 3202.2,3444.47 U2.9@3222.13,3444.47 ; U2.9@3220.41,3442.76 ccw(c3216.28,3438.62) 3216.28,3444.47 ccw(c3216.28,3450.31) U2.9@3220.41,3446.18 ; U2.9@3240.83,3444.47 3129.97,3444.47 v1(3129.5,3444) 3152.51,3444.47 ; v1(2919,2931) v1@2919.99,2931 ; v1(2919,2931) U1.F4@2935.37,2915.61 ; v1(2919,2931) U1.F4@2931.13,2912.31 ; v1(2919,2931) U1.F4@2938.68,2919.85 ; v1(2919,2931) U1.F4@2935.37,2915.61 ; v1@2919.99,2931 U1.F4@2935.37,2915.61 ; v1@2919.99,2931 U1.F4@2931.13,2912.31 ; v1@2919.99,2931 U1.F4@2938.68,2919.85 ; v1@2919.99,2931 U1.F4@2935.37,2915.61 ; U1.F4@2935.37,2915.61 2923.23,2934.52 U1.F4@2935.37,2915.61 ; U1.F4@2935.37,2915.61 2915.75,2926.56 U1.F4@2935.37,2915.61
  SIGNAL_1 w5: v1@2915.63,2935.35 2934.5,2946.5 ; v1(2919,2931) 2934.5,2946.5 ; v1@2919,2936.5 ccw(c2919,2949.78) 2928.39,2940.39 ccw(c2937.78,2931) v1@2924.5,2931 ; v1@2923.35,2927.63 2934.5,2946.5 ; v1@3124.04,3443.34 3129.5,3421 v1@3134.96,3443.34 ; v1@3125.61,3440.11 cw(c3116.22,3430.72) 3129.5,3430.72 cw(c3142.78,3430.72) v1@3133.39,3440.11 ; v1(3129.5,3444) 3129.5,3375.78 2934,3180.28 2934,3026.58 2934.5,3026.08 2934.5,2946.5
NFRE: U1.E1 U2.8 | length 1280.6
  Top Layer w5: v1@2946.44,2997.4 U1.E1@2962.65,3013.43 ; v1@2948.46,2998.98 U1.E1@2970.2,3005.88 ; v1@2950.75,2999.48 ccw(c2950.75,3012.76) 2960.14,3003.37 ccw(c2969.53,2993.98) v1@2956.25,2993.98 ; v1@2954.16,2989.67 U1.E1@2970.2,3005.88 ; v1@2955.75,2991.7 U1.E1@2962.65,3013.43 ; U1.E1@2961.5,3010.1 cw(c2948.52,3010.1) 2957.7,3000.93 cw(c2966.87,2991.75) U1.E1@2966.87,3004.73 ; U1.E1@2967.62,3010.1 U1.E1@2966.87,3010.1 ; v1@3009.02,3139.43 3009,3166.34 ; 3009,3154.46 ccw(c3028.94,3154.46) v1@3014.84,3140.35 ; 3009,3166.53 ccw(c3041.02,3166.53) v1@3018.38,3143.89 ; v1@3019.73,3141.67 3009,3166.34 ; 3202.2,3424.78 U2.8@3222.13,3424.78 ; U2.8@3220.41,3423.07 ccw(c3216.28,3418.94) 3216.28,3424.78 ccw(c3216.28,3430.63) U2.8@3220.41,3426.5 ; U2.8@3240.83,3424.78 3077.78,3424.78 3009,3356 3009,3145.49 v1(3014.49,3140) 3009,3166.34 ; v1(2950.75,2993.98) U1.E1@2966.87,3010.1 ; v1(2950.75,2993.98) U1.E1@2970.2,3005.88 ; v1(2950.75,2993.98) U1.E1@2962.65,3013.43 ; v1(2950.75,2993.98) U1.E1@2966.87,3010.1 ; U1.E1@2966.87,3010.1 2947.36,2998.31 U1.E1@2966.87,3010.1 ; U1.E1@2966.87,3010.1 2955.08,2990.59 U1.E1@2966.87,3010.1
  Bottom Layer w5: v1@2947.29,2998.25 2969.35,3012.59 v1@2955.02,2990.52 ; v1(2950.75,2993.98) 2998,3041.23 2998,3080 3014.49,3096.49 v1(3014.49,3140) 3014.49,3117 ; v1@2950.75,2999.48 ccw(c2950.75,3012.76) 2960.14,3003.37 ccw(c2969.53,2993.98) v1@2956.25,2993.98 ; v1@3009.03,3139.34 3014.49,3117 ; v1@3010.6,3136.11 cw(c3001.21,3126.72) 3014.49,3126.72 cw(c3027.77,3126.72) v1@3018.38,3136.11 ; v1@3019.95,3139.34 3014.49,3117
NFWE: U1.F3 U2.18 | length 1586.5
  Top Layer w5: U1.F3@2935.37,2941.74 cw(c2935.37,2928.76) 2944.55,2937.94 cw(c2953.72,2947.11) U1.F3@2940.75,2947.11 ; 2941.27,2941.22 cw(c2931.05,2931) v1@2945.5,2931 ; 2942.44,2940.05 ccw(c2951,2948.61) v1@2951,2936.5 ; v1@2945.95,2928.82 U1.F3@2939.61,2950.42 ; v1@2946.61,2927.68 U1.F3@2935.37,2947.11 ; v1@2947.53,2926.74 U1.F3@2932.06,2942.88 ; v1@2953.33,2935.98 U1.F3@2932.06,2942.88 ; v1@2954.45,2935.28 U1.F3@2935.37,2947.11 ; v1@2955.37,2934.34 U1.F3@2939.61,2950.42 ; v1@3141.54,3640.73 3163.61,3626.39 v1@3149.27,3648.46 ; v1@3145,3639.5 cw(c3145,3626.22) 3154.39,3635.61 cw(c3163.78,3645) v1@3150.5,3645 ; v1(3145,3645) 3168.37,3621.63 U2.18@3240.83,3621.63 ; 3202.2,3621.63 U2.18@3222.13,3621.63 ; U2.18@3220.41,3619.92 ccw(c3216.28,3615.79) 3216.28,3621.63 ccw(c3216.28,3627.48) U2.18@3220.41,3623.35 ; U1.F3@2932.06,2942.88 v1@2951,2931.48 ; U1.F3@2932.06,2942.88 v1(2951,2931) ; U1.F3@2935.37,2947.11 v1@2951,2931.48 ; U1.F3@2935.37,2947.11 v1(2951,2931) ; U1.F3@2939.61,2950.42 v1@2951,2931.48 ; U1.F3@2939.61,2950.42 v1(2951,2931) ; v1(2951,2931) v1@2951,2931.48
  Bottom Layer w5: v1@2947.63,2926.65 2966.5,2915.5 ; v1@2951,2925.5 cw(c2951,2912.22) 2960.39,2921.61 cw(c2969.78,2931) v1@2956.5,2931 ; v1(2951,2931) 2966.5,2915.5 ; v1@2955.35,2934.37 2966.5,2915.5 ; v1@3141.54,3640.72 3163.5,3626.5 ; v1@3145,3639.5 cw(c3145,3626.22) 3154.39,3635.61 cw(c3163.78,3645) v1@3150.5,3645 ; v1(3145,3645) 3163.5,3626.5 ; v1@3149.28,3648.46 3163.5,3626.5 ; 3163.5,3345.86 3163.5,3335 ; 2966.5,2915.5 3052,2915.5 3052.11,2915.61 3101.61,2915.61 3163.5,2977.5 3163.5,3335 ; 3163.5,3335 3163.5,3626.5
NLED_1: 1.2 U1.K2 | length 1162.8
  Top Layer w5: 1.2@2208.01,3182.64 2229.47,3152.03 ; 1.2@2212.45,3185.31 2229.47,3152.03 ; 1.2@2217.14,3187.32 2229.47,3152.03 ; 1.2@2218.94,3169.53 cw(c2209.67,3152.04) 2229.47,3152.04 ; 1.2@2221.28,3173.94 cw(c2214.07,3160.34) 2229.47,3160.34 cw(c2244.86,3160.34) 1.2@2237.66,3173.94 ; 1.2@2222,3188.66 2229.47,3152.03 ; 1.2@2229.47,3189.41 2229.47,3152.03 ; 1.2@2236.93,3188.66 2229.47,3152.03 ; 1.2@2240,3169.53 ccw(c2249.26,3152.04) 2229.47,3152.04 ; 1.2@2241.79,3187.32 2229.47,3152.03 ; 1.2@2246.48,3185.31 2229.47,3152.03 ; 1.2@2250.92,3182.64 2229.47,3152.03 ; U1.K2@2804.02,2978.61 ccw(c2791.04,2978.61) 2800.22,2987.78 ccw(c2809.39,2996.95) U1.K2@2809.39,2983.98 ; U1.K2@2805.15,2975.3 2794.02,2993.98 ; U1.K2@2812.69,2982.85 2794.02,2993.98 ; 2229.47,3152.03 2240.5,3141 2668.74,3141 2794.02,3015.72 2794.02,2993.98 ; 2794.02,2993.98 U1.K2@2809.39,2978.61 2794.02,2993.98
NLED_2: 2.2 U1.L5 | length 1777.7
  Top Layer w5: 2.2@2229.47,3282.08 2.2@2231.04,3280.5 ; 2.2@2242.11,3276.61 ccw(c2232.72,3267.22) 2232.72,3280.5 ccw(c2232.72,3293.78) 2.2@2242.11,3284.39 ; 2.2@2244.99,3275.09 2.2@2231.04,3280.5 ; 2.2@2244.99,3285.91 2.2@2231.04,3280.5 ; v1(2246,3280.5) 2.2@2231.04,3280.5 ; v1@2758.19,2896.1 U1.L5@2773.65,2880.82 ; v1@2760.32,2894.45 U1.L5@2781.2,2888.36 ; v1@2762.52,2893.99 cw(c2762.52,2880.71) 2771.91,2890.1 cw(c2781.3,2899.49) v1@2768.02,2899.49 ; v1@2765.91,2903.82 U1.L5@2781.2,2888.36 ; v1@2767.56,2901.69 U1.L5@2773.65,2880.82 ; U1.L5@2772.52,2884.12 ccw(c2759.55,2884.12) 2768.72,2893.29 ccw(c2777.89,2902.47) U1.L5@2777.89,2889.49 ; v1(2762.52,2899.49) U1.L5@2777.89,2884.12 ; v1(2762.52,2899.49) U1.L5@2773.65,2880.82 ; v1(2762.52,2899.49) U1.L5@2781.2,2888.36 ; v1(2762.52,2899.49) U1.L5@2777.89,2884.12 ; U1.L5@2777.89,2884.12 2766.87,2902.86 U1.L5@2777.89,2884.12 ; U1.L5@2777.89,2884.12 2759.15,2895.14 U1.L5@2777.89,2884.12
  Bottom Layer w5: v1@2240.5,3280.5 ccw(c2227.22,3280.5) 2236.61,3289.89 ccw(c2246,3299.28) v1@2246,3286 ; v1@2241.73,3277.04 2227.39,3299.11 v1@2249.46,3284.77 ; v1(2246,3280.5) 2222.5,3304 2058.5,3304 2037.76,3283.26 2037.76,3163.36 2058.12,3143 2111,3143 2166,3088 2494.28,3088 2538,3044.28 2538,2993 2552.39,2978.61 2705.33,2978.61 ; 2705.43,2978.5 2739.41,2978.5 2746,2971.92 2746,2916.01 ; v1@2757.02,2899.49 ccw(c2743.74,2899.49) 2753.13,2908.88 ccw(c2762.52,2918.27) v1@2762.52,2904.99 ; v1@2758.2,2896.09 2746,2916.01 ; v1@2765.92,2903.81 2746,2916.01 ; 2746,2916.01 v1(2762.52,2899.49) 2746,2916.01
NLED_3: 3.2 U1.K7 | length 2280.5
  Top Layer w5: v1(2132,3331) 2162.74,3361.74 3.2@2229.47,3361.74 ; v1@2132,3336.5 ccw(c2132,3349.78) 2141.39,3340.39 ccw(c2150.78,3331) v1@2137.5,3331 ; 3.2@2211,3345.83 ccw(c2172.59,3307.42) 2172.59,3361.74 ccw(c2172.59,3416.06) 3.2@2211,3377.65 ; 3.2@2214.53,3349.37 ccw(c2184.66,3319.49) 2184.66,3361.74 ccw(c2184.66,3403.99) 3.2@2214.53,3374.12 ; 3.2@2218.07,3352.9 ccw(c2196.73,3331.57) 2196.73,3361.74 ccw(c2196.73,3391.92) 3.2@2218.07,3370.58 ; 3.2@2220.58,3340.15 2186.91,3361.74 ; 3.2@2220.58,3383.34 2186.91,3361.74 ; 3.2@2223.08,3344.67 2186.91,3361.74 ; 3.2@2223.08,3378.82 2186.91,3361.74 ; 3.2@2224.95,3349.4 2186.91,3361.74 ; 3.2@2224.95,3374.09 2186.91,3361.74 ; 3.2@2226.2,3354.28 2186.91,3361.74 ; 3.2@2226.2,3369.21 2186.91,3361.74 ; 3.2@2226.91,3361.74 2186.91,3361.74 ; v1@2789.65,2808.86 U1.K7@2805.15,2824.43 ; v1@2791.75,2810.52 U1.K7@2812.69,2816.89 ; v1@2794,2811 ccw(c2794,2823.71) 2802.99,2814.72 ; v1@2797.43,2801.2 U1.K7@2812.69,2816.89 ; v1@2799.05,2803.32 U1.K7@2805.15,2824.43 ; v1@2799.5,2805.5 cw(c2813.35,2805.5) 2803.56,2815.29 ; U1.K7@2804.02,2821.13 cw(c2791.04,2821.13) 2800.22,2811.95 cw(c2809.39,2802.78) U1.K7@2809.39,2815.75 ; v1(2794,2805.5) v1@2794,2805.74 ; v1(2794,2805.5) U1.K7@2809.39,2821.13 ; v1(2794,2805.5) U1.K7@2812.69,2816.89 ; v1(2794,2805.5) U1.K7@2805.15,2824.43 ; v1(2794,2805.5) U1.K7@2809.39,2821.13 ; v1@2794,2805.74 U1.K7@2809.39,2821.13 ; v1@2794,2805.74 U1.K7@2812.69,2816.89 ; v1@2794,2805.74 U1.K7@2805.15,2824.43 ; v1@2794,2805.74 U1.K7@2809.39,2821.13 ; U1.K7@2809.39,2821.13 2790.6,2809.82 U1.K7@2809.39,2821.13 ; U1.K7@2809.39,2821.13 2798.37,2802.16 U1.K7@2809.39,2821.13
  SIGNAL_2 w5: v1@2126.54,3330.34 2132,3308 v1@2137.46,3330.34 ; v1@2128.11,3327.11 cw(c2118.72,3317.72) 2132,3317.72 cw(c2145.28,3317.72) v1@2135.89,3327.11 ; v1(2132,3331) 2132,3182 2251.89,3062.11 2643.48,3062.11 2714.9,2990.69 2714.9,2893.69 2724.6,2884 2741.95,2884 2751.96,2873.99 2766.82,2873.99 2788.58,2852.23 2799.92,2852.23 2809,2843.15 2809,2820.5 ; v1@2790.65,2809.86 2809,2820.5 ; v1(2794,2805.5) 2809,2820.5 ; v1@2794,2811 ccw(c2794,2824.28) 2803.39,2814.89 ccw(c2812.78,2805.5) v1@2799.5,2805.5 ; v1@2798.36,2802.15 2809,2820.5
  Bottom Layer w5: v1(2794,2805.5) v1@2794,2807
NLED_4: 4.2 U1.K5 | length 1843
  Top Layer w5: v1@2129.04,3357.66 2134.5,3380 v1@2139.96,3357.66 ; v1@2130.61,3360.89 ccw(c2121.22,3370.28) 2134.5,3370.28 ccw(c2147.78,3370.28) v1@2138.39,3360.89 ; v1(2134.5,3357) 2134.5,3380.5 2195.41,3441.41 ; 4.2@2205.62,3434.12 ccw(c2195.41,3430.62) 2195.41,3441.41 ; 4.2@2205.62,3448.7 cw(c2195.41,3452.2) 2195.41,3441.41 ; 4.2@2218.87,3420.39 2195.41,3441.41 ; 4.2@2218.87,3462.43 2195.41,3441.41 ; 4.2@2222.05,3424.6 2195.41,3441.41 ; 4.2@2222.05,3458.22 2195.41,3441.41 ; 4.2@2224.43,3429.16 2195.41,3441.41 ; 4.2@2224.43,3453.66 2195.41,3441.41 ; 4.2@2226.01,3433.96 2195.41,3441.41 ; 4.2@2226.01,3448.86 2195.41,3441.41 ; 4.2@2226.91,3441.41 2195.41,3441.41 ; 4.2@2229.47,3441.41 2195.41,3441.41 ; v1@2789.69,2872.14 U1.K5@2805.15,2887.42 ; v1@2791.82,2873.79 U1.K5@2812.69,2879.88 ; v1@2794.02,2874.24 ccw(c2794.02,2887.52) 2803.41,2878.13 ccw(c2812.79,2868.74) v1@2799.52,2868.74 ; v1@2797.41,2864.41 U1.K5@2812.69,2879.88 ; v1@2799.06,2866.55 U1.K5@2805.15,2887.42 ; U1.K5@2804.02,2884.12 cw(c2791.04,2884.12) 2800.22,2874.94 cw(c2809.39,2865.77) U1.K5@2809.39,2878.74 ; v1(2794.02,2868.74) U1.K5@2809.39,2884.12 ; v1(2794.02,2868.74) U1.K5@2812.69,2879.88 ; v1(2794.02,2868.74) U1.K5@2805.15,2887.42 ; v1(2794.02,2868.74) U1.K5@2809.39,2884.12 ; U1.K5@2809.39,2884.12 2790.65,2873.09 U1.K5@2809.39,2884.12 ; U1.K5@2809.39,2884.12 2798.37,2865.38 U1.K5@2809.39,2884.12
  SIGNAL_2 w5: v1(2134.5,3357) 2147.5,3344 2147.5,3180.64 2256.03,3072.11 2674.82,3072.11 2746.5,3000.42 2746.5,2893.59 2756.1,2883.99 2774.2,2883.99 2789.45,2868.74 v1(2794.02,2868.74)
NRESET: JTAG2.4 pad.PC10 R2.2 R57.2 U1.H16 U10.12 | length 9777.8
  Top Layer w5: v1@2851.95,2524.95 U1.H16@2868.16,2540.99 ; v1@2853.98,2526.54 U1.H16@2875.71,2533.44 ; v1@2856.26,2527.04 ccw(c2856.26,2540.32) 2865.65,2530.93 ccw(c2875.04,2521.54) v1@2861.76,2521.54 ; v1@2859.68,2517.23 U1.H16@2875.71,2533.44 ; v1@2861.26,2519.25 U1.H16@2868.16,2540.99 ; U1.H16@2867.01,2537.66 cw(c2854.03,2537.66) 2863.21,2528.49 cw(c2872.38,2519.31) 2872.38,2532.29 cw(c2872.38,2519.31) 2881.56,2528.49 cw(c2890.73,2537.66) U1.H16@2877.76,2537.66 ; U1.H16@2869.06,2533.44 2888.5,2521.54 ; U1.H16@2876.6,2540.99 2888.5,2521.54 ; U10.12@4195.83,3503.52 4230.98,3503.52 ; U10.12@4214.53,3503.52 4230.98,3503.52 ; U10.12@4216.24,3501.81 cw(c4220.37,3497.68) 4220.37,3503.52 cw(c4220.37,3509.37) U10.12@4216.24,3505.24 ; 4281.04,2576.13 ccw(c4254.58,2602.59) R2.2@4292,2602.59 ; 4288.29,2583.37 cw(c4304.5,2567.16) R2.2@4304.5,2590.09 ; 4289.58,2584.67 ccw(c4271.65,2602.59) R2.2@4297,2602.59 ; R2.2@4293.81,2609.06 4281.45,2576.54 ; R2.2@4298.38,2606.93 4281.45,2576.54 ; R2.2@4304,2608 4304,2607.59 4304,2599.09 4249,2544.09 ; R2.2@4304.5,2602.59 4281.45,2576.54 ; R2.2@4309.55,2597.04 4281.45,2576.54 ; R2.2@4312.22,2592.76 4281.45,2576.54 ; v1(2856.26,2521.54) U1.H16@2872.38,2537.66 ; v1(2856.26,2521.54) U1.H16@2875.71,2533.44 ; v1(2856.26,2521.54) U1.H16@2868.16,2540.99 ; v1(2856.26,2521.54) U1.H16@2872.38,2537.66 ; U1.H16@2872.38,2537.66 2888.5,2521.54 ; U1.H16@2872.38,2537.66 2852.87,2525.87 U1.H16@2872.38,2537.66 ; U1.H16@2872.38,2537.66 2860.59,2518.15 U1.H16@2872.38,2537.66 ; 2888.5,2521.54 2888.5,2410.58 2926.58,2372.5 4077.41,2372.5 4249,2544.09 ; 4230.98,3503.52 4270,3464.5 4270,3032.42 4249,3011.42 4249,2544.09
  SIGNAL_1 w5: v1@1943.97,3929.97 cw(c1930.69,3929.97) 1940.08,3920.58 cw(c1949.47,3911.19) v1@1949.47,3924.47 ; v1@1945.2,3933.43 1930.87,3911.37 v1@1952.93,3925.7 ; v1(1949.47,3929.97) 1910.5,3891 1910.5,2363.5 1991.5,2282.5 2110.5,2282.5 2186.5,2358.5 2186.5,2556.5 v1(2207.5,2577.5) 2188.89,2558.89 ; v1@2203.23,2580.96 2188.89,2558.89 ; v1@2210.96,2573.23 2188.89,2558.89 ; JTAG2.4@2231.16,2597.57 cw(c2231.16,2546.58) 2267.21,2582.63 cw(c2303.27,2618.69) JTAG2.4@2252.28,2618.69 ; JTAG2.4@2231.16,2602.57 cw(c2231.16,2563.65) 2258.68,2591.17 cw(c2286.2,2618.69) JTAG2.4@2247.28,2618.69 ; JTAG2.4@2231.16,2607.57 cw(c2231.16,2580.72) 2250.14,2599.71 cw(c2269.13,2618.69) JTAG2.4@2242.28,2618.69 ; JTAG2.4@2234.17,2618.69 JTAG2.4@2231.16,2618.69 2272.28,2577.57 2323.29,2577.57 2352,2548.86 2352,2513 v1(2381.5,2483.5) ; v1@2376,2483.5 ccw(c2362.72,2483.5) 2372.11,2492.89 ccw(c2381.5,2502.28) v1@2381.5,2489
  SIGNAL_2 w5: v1@1946.01,3934.25 1968.08,3948.58 v1@1953.75,3926.51 ; v1(1949.47,3929.97) 1978,3958.5 2495.7,3958.5 pad.PC10@2536.76,3917.45 ; v1@1949.47,3935.47 ccw(c1949.47,3948.75) 1958.86,3939.36 ccw(c1968.25,3929.97) v1@1954.97,3929.97 ; pad.PC10@2515.63,3917.45 ccw(c2464.64,3917.45) 2500.7,3953.51 ccw(c2536.76,3989.56) pad.PC10@2536.76,3938.57 ; pad.PC10@2518.92,3906.13 2502.53,3951.68 ; pad.PC10@2520.63,3917.45 ccw(c2481.71,3917.45) 2509.23,3944.97 ccw(c2536.76,3972.49) pad.PC10@2536.76,3933.57 ; pad.PC10@2523.62,3908.11 2502.53,3951.68 ; pad.PC10@2525.63,3917.45 ccw(c2498.78,3917.45) 2517.77,3936.43 ccw(c2536.76,3955.42) pad.PC10@2536.76,3928.57 ; pad.PC10@2528.04,3910.54 2502.53,3951.68 ; pad.PC10@2532.16,3913.4 2502.53,3951.68 ; pad.PC10@2540.8,3922.04 2502.53,3951.68 ; pad.PC10@2543.66,3926.16 2502.53,3951.68 ; pad.PC10@2546.1,3930.59 2502.53,3951.68 ; pad.PC10@2548.07,3935.28 2502.53,3951.68
  Bottom Layer w5: v1@2202.16,2578.8 2210.37,2600.85 ; v1@2202.32,2579.34 2212.74,2600.43 ; v1@2202.53,2579.85 2215.04,2599.88 ; v1@2202.78,2580.32 2217.28,2599.23 ; v1@2203.14,2580.85 JTAG2.4@2220.03,2598.32 ; v1@2203.55,2581.33 JTAG2.4@2222.87,2597.3 ; v1@2203.93,2581.68 JTAG2.4@2225.36,2596.38 ; v1@2204.04,2581.77 2226.11,2596.11 v1@2211.77,2574.04 ; v1@2204.37,2582.02 2226.8,2594.23 ; v1@2204.84,2582.32 2227.7,2591.78 ; JTAG2.4@2210.73,2624.08 v1@2210.04,2580.04 ; v1@2211.15,2573.39 2227.7,2591.78 ; v1@2211.53,2573.76 2226.8,2594.23 ; v1@2211.87,2574.16 JTAG2.4@2225.36,2596.38 ; v1@2212.19,2574.62 JTAG2.4@2222.87,2597.3 ; v1@2212.5,2575.22 JTAG2.4@2220.03,2598.32 ; v1@2212.74,2575.84 2217.28,2599.23 ; v1@2212.88,2576.36 2215.04,2599.88 ; v1@2212.97,2576.91 2212.74,2600.43 ; v1@2213,2577.47 2210.37,2600.85 ; JTAG2.4@2215.83,2623.7 v1@2210.04,2580.04 ; JTAG2.4@2219.88,2600.83 2265,2584.85 ; JTAG2.4@2220.8,2622.75 v1@2210.04,2580.04 ; JTAG2.4@2221.84,2605.53 2265,2584.85 ; JTAG2.4@2224.26,2609.97 2265,2584.85 ; JTAG2.4@2225.59,2621.25 v1@2210.04,2580.04 ; JTAG2.4@2227.11,2614.1 2265,2584.85 ; JTAG2.4@2235.75,2622.74 2265,2584.85 ; JTAG2.4@2236.31,2615.39 v1@2210.04,2580.04 ; JTAG2.4@2239.88,2625.59 2265,2584.85 ; JTAG2.4@2240.16,2612.17 v1@2210.04,2580.04 ; JTAG2.4@2243.65,2608.5 v1@2210.04,2580.04 ; R57.2@2246.45,2467.58 cw(c2256.51,2481.69) 2239.19,2481.69 2265,2507.5 2265,2584.85 ; JTAG2.4@2246.72,2604.42 v1@2210.04,2580.04 ; JTAG2.4@2249.02,2629.96 2265,2584.85 ; v1@2378.07,2487.8 2399,2501 ; v1@2381.5,2484 v1(2381.5,2483.5) 2399,2501 ; v1@2381.5,2489 ccw(c2381.5,2502.28) 2390.89,2492.89 ccw(c2400.28,2483.5) v1@2387,2483.5 ; v1@2385.8,2480.07 2399,2501 ; 2846.65,2511.93 v1(2856.26,2521.54) ; v1@2850.76,2521.54 cw(c2837.48,2521.54) 2846.87,2512.15 cw(c2856.26,2502.76) v1@2856.26,2516.04 ; v1@2851.99,2525 2837.65,2502.93 ; v1@2859.72,2517.26 2837.65,2502.93 ; v1(2207.5,2577.5) JTAG2.4@2225.36,2596.38 ; v1(2207.5,2577.5) 2226.8,2594.23 ; v1(2207.5,2577.5) 2227.7,2591.78 ; v1(2207.5,2577.5) JTAG2.4@2220.03,2598.32 ; v1(2207.5,2577.5) 2217.28,2599.23 ; v1(2207.5,2577.5) JTAG2.4@2222.87,2597.3 ; v1(2207.5,2577.5) 2215.04,2599.88 ; v1(2207.5,2577.5) 2212.74,2600.43 ; v1(2207.5,2577.5) 2210.37,2600.85 ; v1(2207.5,2577.5) 2231.16,2601.16 JTAG2.4@2231.16,2618.69 ; v1@2210.04,2580.04 JTAG2.4@2231.16,2618.69 ; JTAG2.4@2231.16,2618.69 2265,2584.85 ; 2265,2584.85 2244.31,2628.01 2265,2584.85 ; 2399,2501 2835.72,2501 v1(2856.26,2521.54) ; 2837.65,2502.93 v1(2856.26,2521.54)
NRTS0: pad.PA54 U1.L17 | length 1680.5
  Top Layer w5: v1@2772.43,2417.05 2777.89,2439.39 v1@2783.35,2417.05 ; U1.L17@2772.56,2505.53 2777.89,2483.29 U1.L17@2783.23,2505.53 ; v1@2774,2420.28 ccw(c2764.62,2429.67) 2777.89,2429.67 ccw(c2791.17,2429.67) v1@2781.78,2420.28 ; U1.L17@2774.09,2502.36 cw(c2764.92,2493.19) 2777.89,2493.19 cw(c2790.87,2493.19) U1.L17@2781.69,2502.36 ; v1(2777.89,2416.39) U1.L17@2777.89,2506.16
  SIGNAL_1 w5: pad.PA54@2289.22,2006.15 2334.76,2022.54 ; pad.PA54@2291.19,2001.46 2334.76,2022.54 ; pad.PA54@2293.63,1997.03 2334.76,2022.54 ; pad.PA54@2296.49,1992.91 2334.76,2022.54 ; pad.PA54@2300.54,1988.32 2338.22,2026 2382.23,2026 2414,2057.77 2414,2284.07 2526.93,2397 2758.5,2397 v1(2777.89,2416.39) 2759.29,2397.79 ; pad.PA54@2300.54,1999.44 ccw(c2300.54,2026.29) 2319.52,2007.3 ccw(c2338.51,1988.32) pad.PA54@2311.66,1988.32 ; pad.PA54@2300.54,2004.44 ccw(c2300.54,2043.36) 2328.06,2015.84 ccw(c2355.58,1988.32) pad.PA54@2316.66,1988.32 ; pad.PA54@2300.54,2009.44 ccw(c2300.54,2060.43) 2336.59,2024.37 ccw(c2372.65,1988.32) pad.PA54@2321.66,1988.32 ; pad.PA54@2305.13,1984.27 2334.76,2022.54 ; pad.PA54@2309.25,1981.41 2334.76,2022.54 ; pad.PA54@2313.68,1978.97 2334.76,2022.54 ; pad.PA54@2318.37,1977 2334.76,2022.54 ; v1@2772.39,2416.39 cw(c2759.12,2416.39) 2768.5,2407 cw(c2777.89,2397.62) v1@2777.89,2410.89 ; v1@2773.62,2419.86 2759.29,2397.79 ; v1@2781.36,2412.12 2759.29,2397.79
NSS_SPI: U1.J10
NTRST: JTAG2.3 R57.1 R61.2 U1.H15 | length 2138.8
  Top Layer w5: v1@2852.68,2581.14 U1.H15@2868.14,2565.86 ; v1@2854.81,2579.49 U1.H15@2875.68,2573.4 ; v1@2857.01,2579.03 cw(c2857.01,2565.75) 2866.4,2575.14 cw(c2875.79,2584.53) v1@2862.51,2584.53 ; v1@2860.4,2588.86 U1.H15@2875.68,2573.4 ; v1@2862.05,2586.73 U1.H15@2868.14,2565.86 ; U1.H15@2867.01,2569.16 ccw(c2854.03,2569.16) 2863.21,2578.33 ccw(c2872.38,2587.51) U1.H15@2872.38,2574.53 ; v1(2857.01,2584.53) U1.H15@2872.38,2569.16 ; v1(2857.01,2584.53) U1.H15@2868.14,2565.86 ; v1(2857.01,2584.53) U1.H15@2875.68,2573.4 ; v1(2857.01,2584.53) U1.H15@2872.38,2569.16 ; U1.H15@2872.38,2569.16 2861.36,2587.9 U1.H15@2872.38,2569.16 ; U1.H15@2872.38,2569.16 2853.64,2580.18 U1.H15@2872.38,2569.16
  SIGNAL_1 w5: JTAG2.3@2309.9,2618.69 2310.45,2618.69 2372,2557.14 2372,2543 v1(2384.44,2530.56)
  Bottom Layer w5: R57.1@2287.11,2460.61 2299.19,2481.81 ; JTAG2.3@2288.78,2618.2 cw(c2241.7,2617.09) 2275,2583.8 ; R57.1@2291.78,2458.56 2299.19,2481.81 ; R57.1@2291.89,2467.55 ccw(c2281.62,2481.81) 2299.19,2481.81 ; JTAG2.3@2292.06,2630.01 2275.67,2584.46 ; JTAG2.3@2293.78,2618.31 cw(c2257.85,2617.47) 2283.26,2592.06 cw(c2308.68,2566.64) JTAG2.3@2309.52,2602.57 ; JTAG2.3@2296.76,2628.03 2275.67,2584.46 ; JTAG2.3@2298.78,2618.43 cw(c2273.99,2617.85) 2291.52,2600.32 cw(c2309.06,2582.78) JTAG2.3@2309.64,2607.57 ; R57.1@2299.19,2452.41 2299.19,2481.81 ; R57.1@2299.19,2457.41 2299.19,2481.81 ; JTAG2.3@2301.18,2625.6 2275.67,2584.46 ; JTAG2.3@2305.3,2622.74 2275.67,2584.46 ; R57.1@2306.49,2467.55 cw(c2316.75,2481.81) 2299.19,2481.81 ; R57.1@2306.6,2458.56 2299.19,2481.81 ; JTAG2.3@2309.4,2597.58 ccw(c2308.3,2550.5) 2275,2583.8 ; JTAG2.3@2309.9,2618.69 2275,2583.79 ; R57.1@2311.27,2460.61 2299.19,2481.81 ; JTAG2.3@2313.94,2614.1 2275.67,2584.46 ; JTAG2.3@2316.81,2609.98 2275.67,2584.46 ; JTAG2.3@2319.24,2605.55 2275.67,2584.46 ; JTAG2.3@2321.22,2600.86 2275.67,2584.46 ; v1(2384.44,2530.56) 2392.84,2522.16 2815.81,2522.16 2841.23,2547.58 2841.23,2564.93 2857.01,2580.71 v1(2857.01,2584.53) ; 2275,2583.79 2275,2506 2299.19,2481.81
  Bottom Layer w30: R61.2@2299.19,2373.59 R57.1@2299.19,2452.41 2299.19,2378.59 2299.19,2447.41 R61.2@2299.19,2373.59